# Altium PCB Panelmeter_PCB.PcbDoc (part 2 of 2)
Units mm, origin at the board's own origin, x right, y up, seen from the top; angles counter-clockwise.
Board outline 100 x 44.59 mm, 2 copper layers (Top Layer, Bottom Layer); 74 components, 60 nets, 256 pads, 123 vias.
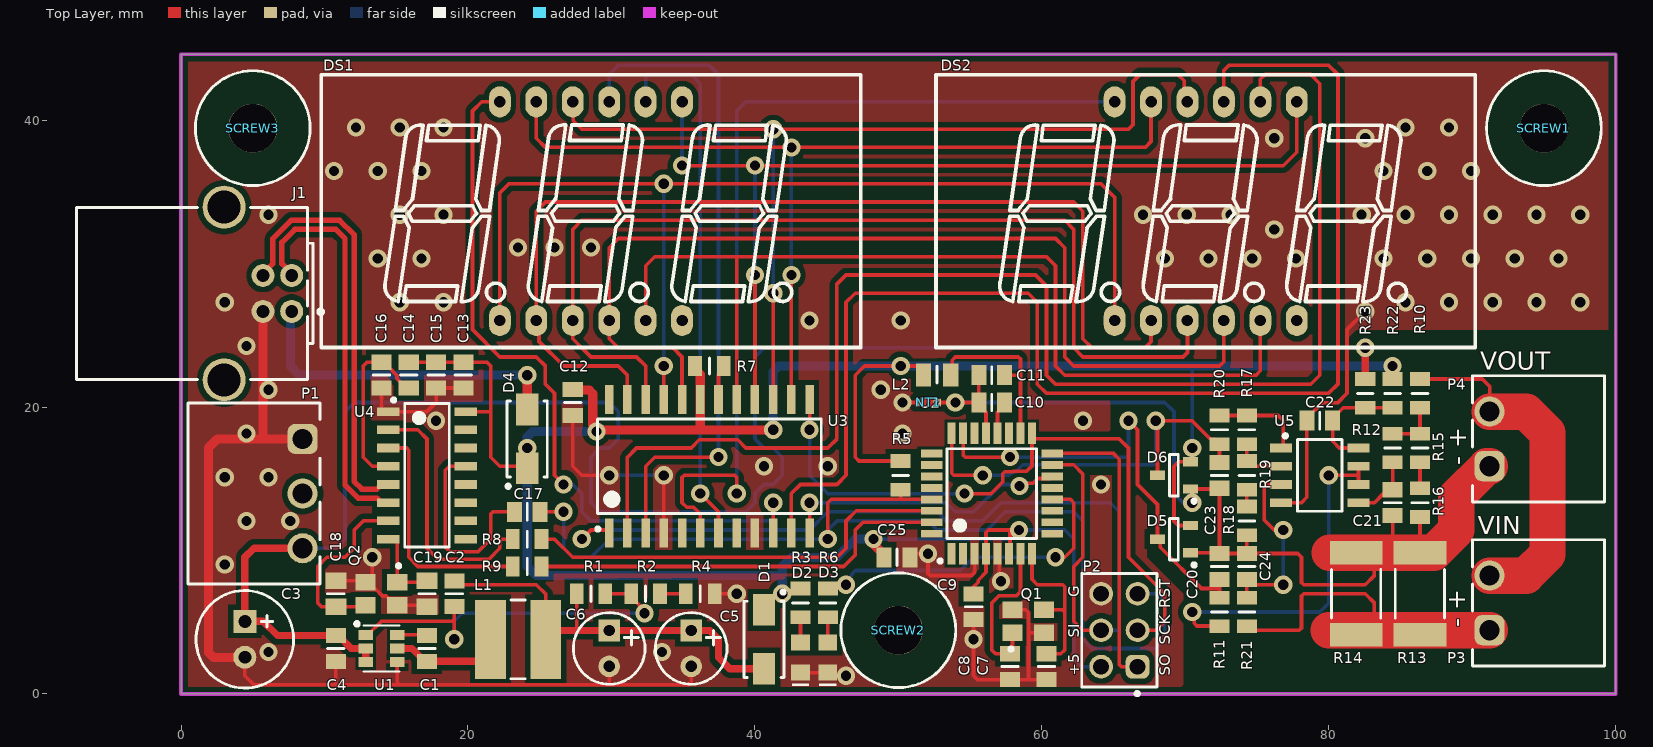
[diagram p0: Top Layer view]

## Via types
v1: diameter 1.27, hole 0.711, Top Layer to Bottom Layer, tented both sides, 123 vias

## Nets (pads, with @x,y where several pads share a name; then routed paths per layer and width w, separated by ;. In a path a pad name is that pad's centre, name@x,y a point inside that pad or via, vN(x,y) a via of type N, cw(c..) or ccw(c..) an arc to the next point about the centre after c; other vN are vias at no path point) (continued)
NetC11_2: (continued)
  Top Layer w0.254: L2.2 53.753,22.323 53.753,23.273 53.975,23.495 58.366,23.495 58.515,23.346 58.515,22.076 ; C11.2 58.366,22.225 58.515,22.076 ; U2.18 58.515,22.076
NetC14_2: C14.2 C16.2 U4.4 | length 12.5
  Top Layer w0.254: U4.4 13.335,15.875 12.7,16.51 12.7,22.86 12.965,23.125 C16.2 14.145,23.125 14.794,22.476 14.794,22.442 15.051,22.185 15.051,21.974 15.7,21.325 C14.2
NetC17_1: C17.1 U4.13 | length 14
  Top Layer w0.254: U4.13 18.695,15.875 18.415,15.595 18.415,10.243 18.752,9.906 20.701,9.906 21.59,10.795 21.59,12.551 21.739,12.7 C17.1
NetC18_2: C18.2 Q2.3 U4.7 | length 12.9
  Top Layer w0.254: Q2.3@12.77,6.085 C18.2 9.79,6.085 9.525,6.35 9.525,8.89 10.16,9.525 11.43,9.525 12.065,10.16 12.065,11.43 12.7,12.065 U4.7
NetC19_2: C19.2 Q2.1 U4.8 | length 5.5
  Top Layer w0.254: U4.8 14.897,10.795 15.07,10.622 Q2.1 ; Q2.1@15.24,7.62 15.24,7.785 C19.2@17.045,7.785
NetC20_2: C20.2 D5.3 R11.2 U2.23 | length 31.9
  Top Layer w0.254: U2.23 54.515,16.659 54.664,16.51 v1(57.785,16.51) ; v1(66.04,19.05) 66.675,18.415 66.675,14.605 68.065,13.215 D5.3 68.248,10.612 68.248,10.238 71.134,7.352 72.39,7.352 ; R11.2 72.39,7.352 ; C20.2 72.39,7.352
  Bottom Layer w0.254: v1(57.785,16.51) 65.891,16.51 66.04,16.659 v1(66.04,19.05)
NetC21_2: C21.2 R12.2 U5.5 | length 4.7
  Top Layer w0.254: U5.5 83.185,13.335 83.82,13.97 84.19,13.97 C21.2 R12.2
NetC23_2: C23.2 D6.3 R20.2 U2.24 | length 30.5
  Top Layer w0.254: U2.24 53.715,15.389 53.864,15.24 v1(55.88,15.24) ; v1(67.945,19.05) 68.065,18.93 D6.3 ; v1@68.065,19.05 70.467,19.05 71.754,17.763 72.042,17.763 R20.2 C23.2
  Bottom Layer w0.254: v1(55.88,15.24) 57.741,15.24 57.995,15.494 58.206,15.494 58.682,15.97 67.796,15.97 67.945,16.119 v1(67.945,19.05)
NetC24_2: C24.2 R21.2 U5.3 | length 12.7
  Top Layer w0.254: R21.2 74.295,7.815 74.49,7.62 v1(76.835,7.62) ; U5.3 75.714,14.605 75.519,14.41 75.519,12.111 76.2,11.43 v1(76.835,11.43)
  Bottom Layer w0.254: v1(76.835,7.62) v1(76.835,11.43)
NetD2_2: D2.2 R3.1 | length 1.8
  Top Layer w0.254: D2.2 R3.1
NetD3_2: D3.2 R6.1 | length 1.8
  Top Layer w0.254: D3.2 R6.1
NetD4_2: D4.2 J1.1 | length 23
  Top Layer w0.635: D4.2 v1(24.13,22.225)
  Bottom Layer w0.635: J1.1 7.62,26.575 7.62,22.86 8.255,22.225 v1(24.13,22.225)
NetP3_1: P3.1 R13.2 R14.2 R21.1 | length 25.7
  Top Layer w0.254: R21.1@74.295,4.445 77.956,4.445 78.105,4.594 78.105,6.836 78.254,6.985 82.55,6.985 83.185,6.35 83.185,5.4 82.972,5.187 82.972,4.828 82.589,4.445 82.274,4.13 R14.2
  Top Layer w2.54: 80.01,4.445 82.589,4.445 P3.1
NetP3_2: P3.2 P4.2 R10.2 | length 24.6
  Top Layer w0.254: R10.2 90.708,21.955 91.215,21.448 P4.2
  Top Layer w2.54: P3.2 93.762,8.255 95.25,9.743 95.25,18.197 93.762,19.685 P4.2
NetR2_1: R2.1 R4.2 | length 1.8
  Top Layer w0.254: R2.1 R4.2
NetR6_2: R6.2 U2.12 | length 21.9
  Top Layer w0.254: U2.12 61.995,13.57 62.23,13.335 62.23,10.16 61.595,9.525 v1(60.96,9.525)
  Bottom Layer w0.254: v1(46.355,7.62) 46.355,7.895 46.808,8.348 46.808,8.424 46.988,8.604 49.55,8.604 54.323,8.603 55.245,9.525 v1(60.96,9.525)
NetR7_1: R7.1 U3.18 | length 2.5
  Top Layer w0.254: U3.18 37.465,22.27 37.83,22.635 R7.1
NetR8_1: R8.1 U4.2 | length 17.7
  Top Layer w0.254: U4.2 16.51,18.415 17.145,17.78 17.145,10.16 17.907,9.398 21.463,9.398 22.225,10.16 22.225,10.646 22.374,10.795 R8.1
NetR8_2: R8.2 U2.30 | length 30.2
  Top Layer w0.254: R8.2 26.035,10.795 27.305,9.525 45.72,9.525 46.355,10.16 46.355,12.065 47.06,12.77 U2.30
NetR9_1: R9.1 U4.3 | length 16.5
  Top Layer w0.254: U4.3 15.726,17.145 15.875,16.996 15.875,9.525 16.51,8.89 R9.1
NetR9_2: R9.2 U2.31 | length 29.5
  Top Layer w0.254: R9.2 46.188,8.89 46.99,9.692 46.99,11.43 47.53,11.97 U2.31
NetR10_1: R10.1 R12.1 R15.2 | length 3.7
  Top Layer w0.254: R12.1 R15.2 R10.1
NetR11_1: R11.1 U5.6 U5.7 | length 24.7
  Top Layer w0.254: v1(70.485,5.715) 70.632,5.568 70.632,4.933 70.823,4.742 72.363,4.742 R11.1 ; v1(80.01,15.24) 82.075,15.24 ; U5.6 82.075,15.24 ; U5.7 82.075,15.24
  Bottom Layer w0.254: v1(70.485,5.715) 79.375,5.715 80.01,6.35 v1(80.01,15.24)
NetR15_1: R15.1 R16.2 | length 1.8
  Top Layer w0.254: R16.2 R15.1
NetR17_1: R17.1 R19.2 U5.2 | length 3.7
  Top Layer w0.254: R17.1 R19.2 74.52,16.24 74.885,15.875 U5.2
NetR17_2: R17.2 R20.1 U5.1 | length 6.6
  Top Layer w0.254: R20.1 R17.2 76.47,19.415 76.835,19.05 76.835,17.305 U5.1
NetR18_2: R18.2 R19.1 | length 1.2
  Top Layer w0.254: R18.2 R19.1
NetU2_14: U2.14 U3.12 | length 20.4
  Top Layer w0.254: U3.12 v1(43.815,13.335) ; v1(58.444,14.506) 58.638,14.701 59.405,14.701 59.726,15.022 60.567,15.022 U2.14
  Bottom Layer w0.254: v1(43.815,13.335) 53.34,13.335 53.975,12.7 55.245,12.7 57.15,14.605 58.345,14.605 v1(58.444,14.506)
RESET: C17.2 P2.5 R5.1 U2.29 | length 72.9
  Top Layer w0.254: C17.2 v1(26.67,12.7) ; v1(45.085,10.795) 45.085,13.335 45.32,13.57 50.165,13.57 ; R5.1 50.165,13.57 ; U2.29 50.165,13.57
  Bottom Layer w0.254: v1(26.67,12.7) 26.67,10.16 27.305,9.525 28.575,9.525 29.845,10.795 v1(45.085,10.795) 45.085,11.43 45.72,12.065 52.07,12.065 52.705,11.43 56.189,11.43 57.459,12.7 62.23,12.7 62.865,12.065 62.865,3.81 63.5,3.175 67.945,3.175 68.58,3.81 68.58,6.425 68.02,6.985 P2.5
S0: DS2.8 U3.2 | length 99.1
  Top Layer w0.254: U3.2 31.115,16.51 31.75,17.145 35.56,17.145 36.131,17.716 38.799,17.716 39.37,17.145 45.085,17.145 45.72,17.78 45.72,27.94 45.72,28.575 46.355,29.21 59.557,29.21 60.325,28.442 60.325,22.225 60.96,21.59 78.74,21.59 79.375,22.225 79.375,42.545 78.74,43.18 75.565,43.18 75.235,42.85 DS2.8
S1: DS2.9 U3.11 | length 92.3
  Top Layer w0.254: U3.11 42.545,13.97 43.18,14.605 45.72,14.605 46.355,15.24 46.355,27.305 46.99,27.94 59.055,27.94 59.69,27.305 59.69,21.59 60.325,20.955 79.988,20.955 80.645,21.612 80.645,43.18 80.01,43.815 73.025,43.815 72.695,43.485 DS2.9
S2: DS2.12 U3.6 | length 63
  Top Layer w0.254: U3.6 36.195,12.551 35.729,13.018 35.242,13.018 34.925,13.335 34.925,15.091 35.074,15.24 38.586,15.24 38.735,15.091 v1(38.735,13.97)
  Bottom Layer w0.254: v1(38.735,13.97) 38.735,40.64 39.37,41.275 DS2.12
S3: DS1.8 U3.7 | length 38
  Top Layer w0.254: DS1.8 DS1.8@32.575,41.465 ; v1(36.195,13.97) 37.465,12.7 U3.7
  Bottom Layer w0.254: DS1.8 32.385,43.031 32.534,43.18 35.56,43.18 36.195,42.545 v1(36.195,13.97)
S4: DS1.9 U3.3 | length 46.7
  Top Layer w0.254: U3.3 32.385,15.875 33.02,16.51 v1(37.465,16.51)
  Bottom Layer w0.254: DS1.9 29.845,43.18 30.48,43.815 36.83,43.815 37.465,43.18 v1(37.465,16.51)
S5: DS1.12 U3.10 | length 52
  Top Layer w0.254: DS1.12 20.955,41.275 20.32,40.64 20.32,25.4 22.225,23.495 24.765,23.495 25.4,22.86 25.4,21.59 26.035,20.955 26.035,15.24 v1(26.67,14.605) ; U3.10 v1(41.275,13.335)
  Bottom Layer w0.254: v1(26.67,14.605) 27.305,14.605 27.94,13.97 27.94,12.7 28.575,12.065 41.126,12.065 41.275,12.214 v1(41.275,13.335)
SCK: P2.3 U2.17 U3.13 | length 47.1
  Top Layer w0.254: v1(43.815,18.415) U3.13 ; v1(54.61,13.97) 56.471,13.97 57.277,14.776 57.277,15.345 57.426,15.494 57.995,15.494 58.023,15.522 58.94,15.522 59.315,15.897 U2.17@59.315,17.928 ; U2.17 U2.17@59.315,17.928 ; P2.3 68.02,4.445 68.58,5.005 68.58,6.985 66.04,9.525 66.04,17.145 65.405,17.78 59.463,17.78 U2.17@59.315,17.928
  Bottom Layer w0.254: v1(43.815,18.415) 43.815,15.24 45.085,13.97 v1(54.61,13.97)
V_OP: C22.2 R22.1 R23.1 U5.8 | length 8.1
  Top Layer w0.254: U5.8 80.744,17.145 80.275,17.614 C22.2 80.275,19.225 81.005,19.955 R23.1 R22.1
VIN: C3.1 C4.2 P1.3 R23.2 U1.2 U1.3 | length 127.5
  Top Layer w0.508: P1.3 5.08,10.16 4.445,9.525 C3.1 4.465,5.08 5.715,5.08 6.72,4.075 C4.2 10.97,4.075 11.87,3.175 U1.2 U1.3 ; R23.2 v1(82.55,24.13)
  Bottom Layer w0.254: P1.3 10.795,10.16 11.43,10.795 11.43,19.685 12.065,20.32 29.845,20.32 30.48,19.685 30.48,17.78 29.845,17.145 29.21,17.145 28.575,16.51 28.575,13.335 29.21,12.7 39.37,12.7 40.005,13.335 40.005,13.97 40.64,14.605 41.275,14.605 41.91,15.24 41.91,16.51 41.275,17.145 40.64,17.145 40.005,17.78 40.005,23.495 40.64,24.13 v1(82.55,24.13)
XTAL1: C8.1 Q1.1 U2.7 | length 11.2
  Top Layer w0.254: Q1.1 57.955,2.975 C8.1 56.78,2.805 56.515,3.07 56.515,6.35 57.001,6.836 58.217,6.836 58.515,7.134 U2.7
XTAL2: C7.2 Q1.3 U2.8 | length 12.2
  Top Layer w0.254: U2.8 59.315,7.995 59.69,7.62 61.446,7.62 61.595,7.471 61.595,5.715 ; C7.2 61.33,2.805 61.595,3.07 61.595,5.715 ; Q1.3@60.603,5.432 Q1.3 61.43,5.88 61.595,5.715
pads on no net: DS1.6 DS2.6 J1.5 P1.2 U2.1 U2.2 U2.9 U2.10 U2.11 U2.13 U2.19 U2.22 U2.25 U2.26 U2.27 U2.28 U2.32 U3.5 U3.8 U3.24 U4.9 U4.10 U4.11 U4.12 U4.14 U4.15

## Polygon pours and split planes (outlines as drawn)
GND on Bottom Layer "GND_L02_P002" (solid, remove dead copper, pour order 2): 0,0 69.215,0 69.85,0.635 69.85,6.985 67.31,9.525 67.31,14.58 66.675,15.24 62.865,15.24 62.23,14.605 55.245,14.605 54.61,15.24 54.61,17.145 55.245,17.78 64.135,17.78 64.77,18.415 64.77,20.32 65.405,20.955 80.645,20.955 81.28,21.59 81.28,24.765 81.915,25.4 99.695,25.4 99.695,44.45 99.56,44.585 0,44.585
GND on Top Layer "GND_L01_P000" (solid, remove dead copper, pour order 0): 0,0 69.215,0 69.85,0.635 69.85,6.985 67.31,9.525 67.31,14.605 66.675,15.24 62.865,15.24 62.23,14.605 55.245,14.605 54.61,15.24 54.61,17.145 55.245,17.78 64.135,17.78 64.77,18.415 64.77,20.32 65.405,20.955 80.645,20.955 81.28,21.59 81.28,24.765 81.915,25.4 99.695,25.4 99.695,44.45 99.56,44.585 0,44.585

## Keep-outs
Keep-Out Layer:
  the board outline again, w0.254

## Silkscreen, mask and mechanical layers (free items; w line width, h text height)
Top Overlay:
  text "VOUT" at 90.551,22.606 h1.27
  text "- +" at 89.573,15.946 h1.27 r90
  text "VIN" at 90.396,11.136 h1.27
  text "G" at 62.611,6.731 h0.76 r90
  text "RST" at 68.961,5.969 h0.76 r90
  text "- +" at 89.535,4.657 h1.27 r90
  text "SI" at 62.611,3.937 h0.76 r90
  text "SCK" at 68.961,3.429 h0.76 r90
  text "+5" at 62.611,1.27 h0.76 r90
  text "SO" at 68.961,1.27 h0.76 r90